# Allegro board twinsync_r1.brd
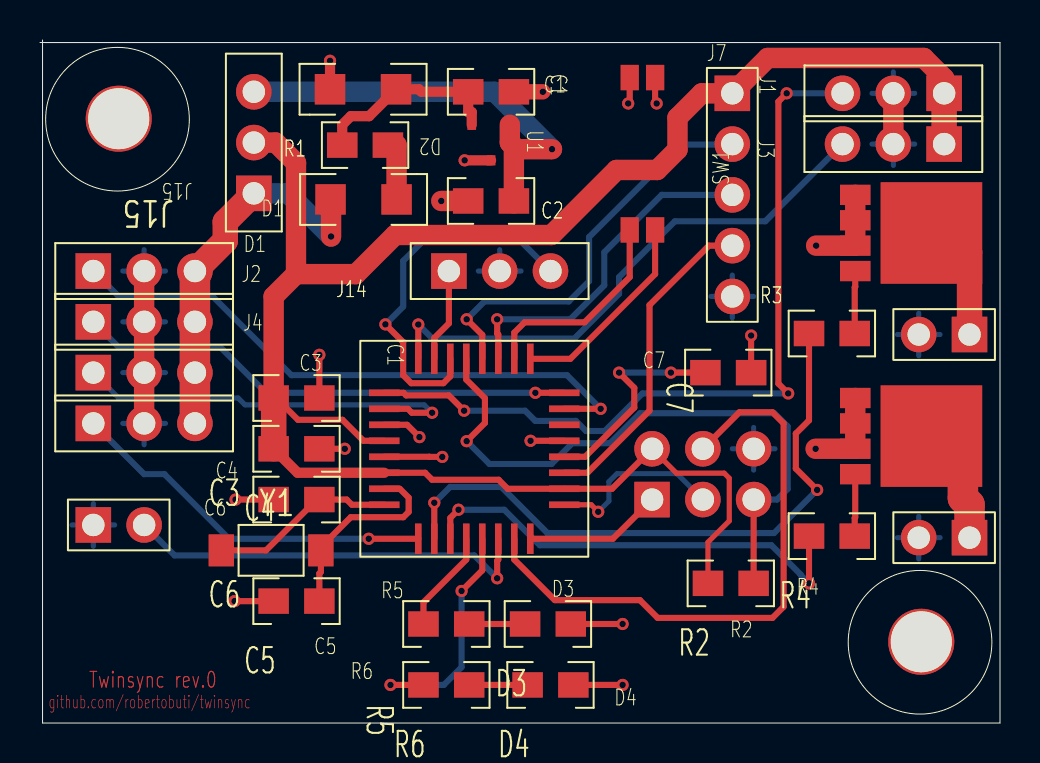
[diagram p0: board, top side]
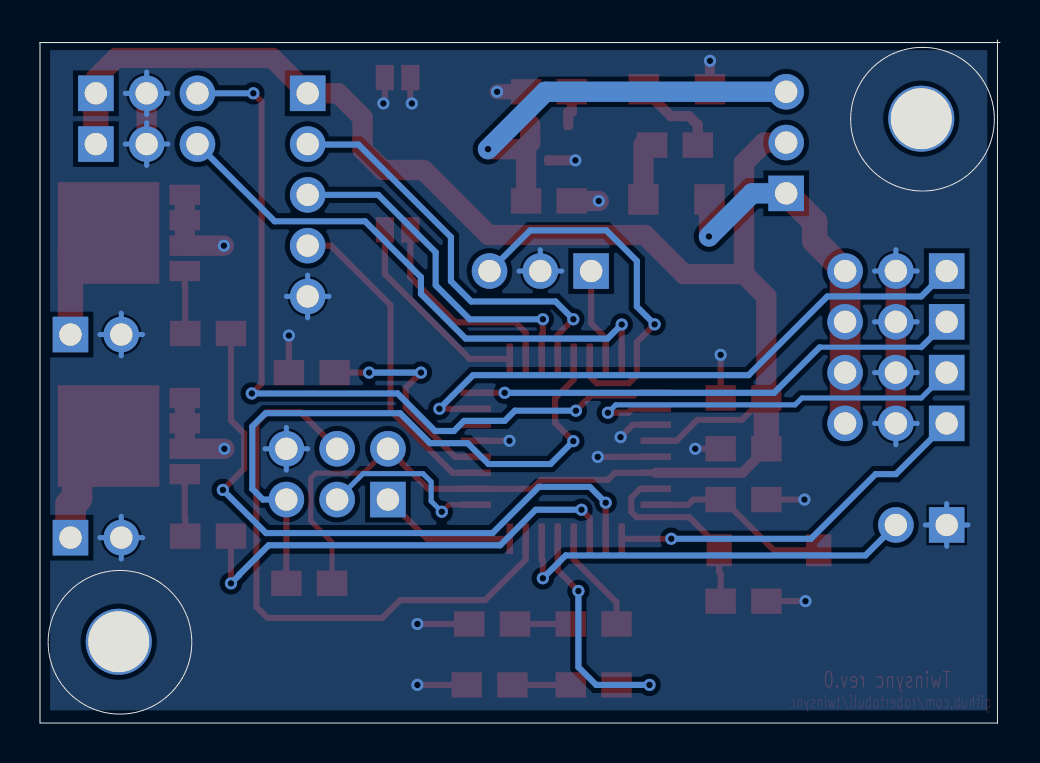
[diagram p1: board, bottom side, seen from below]

Outline 48.01 x 34.16 mm; copper layers: TOP, BOTTOM. Coordinates in mm from the lower left corner of the outline.
Outline path: circle c3.88,30.2 r3.59 ; circle c44.01,4.04 r3.59 ; 0,34.04 48.01,34.04 48.01,0 0.13,0 0.13,34.16

## Placement (name value [footprint] x y rotation side)
C1  100nF  [0805RF_WV_12D]  22.56 31.57 0 top
C2  100nF  [0805RF_WV_12D]  22.56 26.11 180 top
C3  100nF  [0805RF_WV_12D]  12.83 16.26 0 top
C4  100nF  [0805RF_WV_12D]  12.83 13.72 0 top
C5  22pF  [0805RF_WV_12D]  12.83 6.1 0 top
C6  22pF  [0805RF_WV_12D]  12.83 11.18 0 top
C7  100nF  [0805RF_WV_12D]  34.42 17.53 0 top
D1  LL4148  [MINIMELF]  16.18 26.19 0 top
D2  12V 400mW  [MINIMELF]  16.15 31.7 180 top
D3  rosso  [0805LED]  25.4 4.95 0 top
D4  giallo  [0805LED]  25.53 1.9 0 top
IC1  ATmega168-TQFP32  [TQFP32]  21.72 13.72 0 top
J1  HEADER 3  [JUMPER3]  42.67 31.5 270 top
J2  HEADER 3  [JUMPER3]  5.21 22.61 90 top
J3  HEADER 3  [JUMPER3]  42.67 28.96 270 top
J4  HEADER 3  [JUMPER3]  5.21 20.07 90 top
J5  HEADER 3  [JUMPER3]  5.21 17.53 90 top
J6  HEADER 3  [JUMPER3]  5.21 14.99 90 top
J7  HEADER 5  [JUMPER5]  34.62 31.5 270 top
J8  HEADER 2  [JUMPER2]  2.67 9.91 0 top
J9  PSMN0R7-25YLD  [LFPAK56]  43.31 25.15 0 top
J10  HEADER 2  [JUMPER2]  46.48 19.43 180 top
J11  PSMN0R7-25YLD  [LFPAK56]  43.31 14.99 0 top
J12  HEADER 2  [JUMPER2]  46.48 9.27 180 top
J13  HEADER 3X2  [JUMPER3X2]  35.69 11.18 90 top
J14  HEADER 3  [JUMPER3]  22.99 22.61 90 top
J15  jumper 3  [JUMPER3]  10.69 29.03 180 top
NOREF  -  [unnamed]  44.07 4.06 0 top
NOREF#2  -  [unnamed]  3.94 30.23 0 top
R1  10  [0805RF_WV_12D]  16.26 28.91 180 top
R2  10K  [0805RF_WV_12D]  34.54 6.98 0 top
R3  330  [0805RF_WV_12D]  39.6 19.48 0 top
R4  330  [0805RF_WV_12D]  39.6 9.35 0 top
R5  330  [0805RF_WV_12D]  20.32 4.95 0 top
R6  330  [0805RF_WV_12D]  20.32 1.9 0 top
SW1  SW DIP-2  [SOIC4W]  31.39 28.47 90 top
U1  LM3840IM3-5  [SOT23]  22.56 29.03 270 top
Y1  16MHz  [XTAL]  11.56 8.64 0 top

## Library data of the parts
C1-C7 = CAP NP
D1 = DIODE
D2 = DIODE ZENER
D3 D4 = LED
IC1 = ATmega168-TQFP32_2
J1-J6 J14 J15 = HEADER 3
J7 = HEADER 5
J8 J10 J12 = HEADER 2
J9 J11 = PSMN0R7-25YLD
J13 = HEADER 3X2
R1-R6 = R
SW1 = SW DIP-2
U1 = 73-OV_1
Y1 = CRYSTAL

## Footprints (pads in the part's own frame, mm; a bottom-side part is the same pattern mirrored in y, then rotated)
0805LED
  rect 1.524x1.27 smd: 1(-1.143,0) 2(1.143,0)
0805RF_WV_12D
  rect 1.524x1.27 smd: 1(-1.143,0) 2(1.143,0)
JUMPER2
  rect 1.778x1.778 hole 1.118: 1(0,0)
  round 1.778 hole 1.118: 2(2.54,0)
JUMPER3
  rect 1.778x1.778 hole 1.118: 1(0,2.54)
  round 1.778 hole 1.118: 2(0,0) 3(0,-2.54)
JUMPER3X2
  rect 1.778x1.778 hole 1.118: 1(0,5.08)
  round 1.778 hole 1.118: 2(2.54,5.08) 3(0,2.54) 4(2.54,2.54) 5(0,0) 6(2.54,0)
JUMPER5
  rect 1.778x1.778 hole 1.118: 1(0,0)
  round 1.778 hole 1.118: 2(2.54,0) 3(5.08,0) 4(7.62,0) 5(10.16,0)
LFPAK56
  rect 1.524x1.016 smd: 1(-2.54,1.27) 2(-2.54,0) 3(-2.54,-1.27) 4(-2.54,-2.54)
  rect 5.08x5.08 smd: 5(1.27,-0.635)
MINIMELF
  rect 1.524x1.524 smd: 1(-1.651,0) 2(1.651,0)
SOIC4W
  rect 1.27x0.914 smd: 1(-3.81,1.905) 2(-3.81,0.635) 3(3.81,0.635) 4(3.81,1.905)
SOT23
  rect 0.508x0.432 smd: 1(-0.889,0.94) 2(-0.889,-0.965) 3(0.889,0)
TQFP32
  rect 1.524x0.33 smd: 1(-4.5,2.8) 2(-4.5,2) 3(-4.5,1.2) 4(-4.5,0.4) 5(-4.5,-0.4) 6(-4.5,-1.2) 7(-4.5,-2) 8(-4.5,-2.8) 17(4.5,-2.8) 18(4.5,-2) 19(4.5,-1.2) 20(4.5,-0.4) 21(4.5,0.4) 22(4.5,1.2) 23(4.5,2) 24(4.5,2.8)
  rect 0.33x1.524 smd: 9(-2.8,-4.5) 10(-2,-4.5) 11(-1.2,-4.5) 12(-0.4,-4.5) 13(0.4,-4.5) 14(1.2,-4.5) 15(2,-4.5) 16(2.8,-4.5) 25(2.8,4.5) 26(2,4.5) 27(1.2,4.5) 28(0.4,4.5) 29(-0.4,4.5) 30(-1.2,4.5) 31(-2,4.5) 32(-2.8,4.5)
unnamed
  round 3.302 hole 3.048: (0,0)
XTAL
  rect 1.27x1.6 smd: 1(-2.489,0) 2(2.489,0)

## Nets
+5V: C3.1 C4.1 IC1.4(VCC1) IC1.6(VCC2) IC1.18(AVCC) J1.1 J3.1 J7.1 J13.2 J15.2 R2.1
GND_SIGNAL: C1.2 C2.2 C3.2 C4.2 C5.1 C6.1 C7.2 D2.2(ANODE) D3.2(CATHODE) D4.2(CATHODE) IC1.3(GND1) IC1.5(GND2) IC1.21(GND3) J1.2 J2.2 J3.2 J4.2 J5.2 J6.2 J7.5 J8.1 J9.1(S1) J9.2(S2) J9.3(S3) J10.2 J11.1(S1) J11.2(S2) J11.3(S3) J12.2 J13.6 J14.2 SW1.3(B2) SW1.4(B1) U1.3(GND)
ADC6: IC1.19(ADC6) J7.4
MISO: IC1.16(PB4(MISO/PCINT4)) J13.1
MOSI: IC1.15(PB3(MOSI/OC2A/PCINT3)) J13.4
PB0: IC1.12(PB0(ICP/PCINT0)) R5.1
PB1: IC1.13(PB1(OC1A/PCINT1)) R6.1
PB2: IC1.14(PB2(S\S\/OSC1B/PCINT2)) J8.2
PC0: IC1.23((ADC0/PCINT8)PC0) J2.1
PC1: IC1.24((ADC1/PCINT9)PC1) J4.1
PD4: IC1.2((XCK/T0/PCINT20)PD4) J5.1
PD5: IC1.9((T1/OC0B/PCINT21)PD5) J6.1
PD6: IC1.10((AIN0OC0A/PCINT22)PD6) R3.1
PD7: IC1.11((AIN1/PCINT23)PD7) R4.1
RESET: IC1.29((R\E\S\E\T\/PCINT14)PC6) J13.5 R2.2
RX: IC1.30((RXD/PCINT16)PD0) J14.3
SCK: IC1.17(PB5(SCK/PCINT5)) J13.3
SCL: IC1.28((ADC5/SCL/PCINT13)PC5) J7.2
SDA: IC1.27((ADC4/SDA/PCINT12)PC4) J7.3
TX: IC1.31((TXD/PCINT17)PD1) J14.1
V+: D1.1(A) J2.3 J4.3 J5.3 J6.3 J15.1
N02360: IC1.32((INT0/PCINT18)PD2) J3.3
N02372: IC1.1((INT1/OC2B/PCINT19)PD3) J1.3
N03923: C5.2 IC1.7(PB6(XTAL1/TOSC1/PCINT6)) Y1.2
N04074: C6.2 IC1.8(PB7(XTAL2/TOSC2/PCINT7)) Y1.1
N04680: C7.1 IC1.20(AREF)
N05693: D3.1(ANODE) R5.2
N05769: D4.1(ANODE) R6.2
N06773: IC1.26((ADC3/PCINT11)PC3) SW1.1(A1)
N06777: IC1.25((ADC2/PCINT10)PC2) SW1.2(A2)
N08505: C1.1 D2.1(CATHODE) R1.2 U1.2(IN)
N08538: C2.1 J15.3 U1.1(OUT+)
N25313: D1.2(K) R1.1
N30395: J9.5(D) J10.1
N30462: J9.4(G) R3.2
N30823: J11.5(D) J12.1
N30877: J11.4(G) R4.2

Pads without a net: IC1 22

## Via types
v1: diameter 0.61, hole 0.33, TOP to BOTTOM, 42 vias

## Routing (per net, layer and track width the routed paths; a pad name or vN(x,y) marks a point on that pad's centre or on a via; arc(x,y) is an arc through that point)
+5V: length 96
  TOP w0.254: J13.2 31.83,12.5 34.21,12.5 34.47,12.24 34.47,10.11 33.4,9.04 R2.1
  TOP w0.305: IC1.4 16.18,14.12 15.13,15.16 12.9,15.16 11.81,16.26 C3.1 ; IC1.6 19.26,12.52 19.61,12.17 22.94,12.17 23.39,11.72 IC1.18 28.61,11.72 J13.2
  TOP w0.508: IC1.6 12.88,12.52 C4.1
  TOP w1.016: 12.8,22.45 12.8,28.02 11.79,29.03 J15.2 ; 12.8,22.45 11.68,21.34 C3.1 ; 12.8,22.45 15.8,22.45 17.75,24.41 25.58,24.41 28.83,27.66 30.86,27.66 31.88,28.68 31.88,30.28 33.1,31.5 J7.1 36.39,33.26 44.2,33.26 45.21,32.25 J1.1
  TOP w1.27: J3.1 J1.1 ; C3.1 C4.1
GND_SIGNAL: length 92
  TOP w0.305: 35.56,17.53 v1(35.56,19.38) ; v1(20.12,13.31) 19.47,13.31 19.46,13.32 IC1.5 ; D4.2 v1(29.13,1.9) ; SW1.4 29.49,30.99 v1(29.41,30.99) ; D3.2 v1(29.13,4.95) ; C4.2 v1(15.24,13.72) ; C5.1 v1(9.73,6.1) ; IC1.3 18.36,14.92 v1(18.97,14.3) ; SW1.3 30.76,30.99 v1(30.84,30.99) ; C6.1 v1(9.78,11.18) ; IC1.21 v1(24.53,14.12) ; C3.2 v1(13.97,18.41)
  TOP w0.508: U1.3 v1(21.23,28.14) ; D2.2 v1(14.5,33.12)
  TOP w0.762: C1.2 v1(25.15,31.57)
  TOP w1.016: J9.1 J9.2 J9.3 v1(38.81,23.88) ; C2.2 v1(20.07,26.11) ; J2.2 J4.2 J5.2 J6.2 ; v1(38.79,13.72) J11.3 J11.2 J11.1 ; J1.2 J3.2
  BOTTOM w0.254: J14.2 22.99,23.67 ; J14.2 24.05,22.61 ; J14.2 21.92,22.61 ; 4.14,20.07 J4.2 6.27,20.07 ; J10.2 43.94,20.5 ; J10.2 42.87,19.43 ; J10.2 45.01,19.43 ; J10.2 43.94,18.36 ; J13.6 36.75,13.72 ; J13.6 35.69,14.78 ; J13.6 35.69,12.65 ; J13.6 34.62,13.72 ; 41.6,31.5 J1.2 ; J1.2 42.67,32.56 ; J1.2 43.74,31.5 ; J1.2 42.67,30.43 ; 34.62,20.27 J7.5 ; J7.5 35.69,21.34 ; J7.5 34.62,22.4 ; J7.5 33.55,21.34 ; 4.14,17.53 J5.2 6.27,17.53 ; 43.94,8.2 J12.2 ; J12.2 43.94,10.34 ; J12.2 42.87,9.27 ; J12.2 45.01,9.27 ; J2.2 6.27,22.61 ; J2.2 5.21,23.67 ; J2.2 4.14,22.61 ; 41.6,28.96 J3.2 ; J3.2 43.74,28.96 ; J3.2 42.67,30.02 ; J3.2 42.67,27.89 ; J8.1 2.67,10.97 ; J8.1 2.67,8.84 ; J8.1 3.73,9.91 ; J8.1 1.6,9.91 ; J6.2 6.27,14.99 ; J6.2 5.21,13.92 ; J6.2 4.14,14.99
ADC6: length 16.2
  TOP w0.305: J7.4 33.45,23.88 30.48,20.9 30.48,15.62 27.38,12.52 IC1.19
MISO: length 6.9
  TOP w0.305: J13.1 28.65,9.22 IC1.16
MOSI: length 30.1
  TOP w0.305: J13.4 34.98,15.54 36.63,15.54 37.19,14.99 37.19,5.82 36.63,5.26 30.89,5.26 30,6.15 25.74,6.15 23.72,8.17 IC1.15
PB0: length 5.1
  TOP w0.305: R5.1 19.18,6.03 21.32,8.17 IC1.12
PB1: length 12.4
  TOP w0.305: v1(21.08,6.6) 22.12,7.64 IC1.13 ; v1(17.53,1.9) R6.1
  BOTTOM w0.305: v1(17.53,1.9) 20.19,1.9 21.08,2.79 v1(21.08,6.6)
PB2: length 20.8
  TOP w0.305: IC1.14 22.92,8.17 22.86,8.12 v1(22.86,7.24)
  BOTTOM w0.305: v1(22.86,7.24) 21.72,8.38 6.73,8.38 J8.2
PC0: length 30
  TOP w0.305: IC1.23 v1(28.03,15.72)
  BOTTOM w0.305: J2.1 3.94,21.34 8.64,21.34 12.57,17.4 26.35,17.4 v1(28.03,15.72)
PC1: length 25
  TOP w0.305: IC1.24 v1(24.77,16.52)
  BOTTOM w0.254: 3.94,18.8 9.02,18.8
  BOTTOM w0.305: v1(24.77,16.52) 11.3,16.52 9.02,18.8 ; J4.1 3.94,18.8
PD4: length 20.2
  TOP w0.305: IC1.2 18.4,15.72 18.59,15.52 v1(19.61,15.52)
  BOTTOM w0.254: v1(19.61,15.52) 19.21,15.91 10.25,15.91 9.91,16.26 3.94,16.26 J5.1
PD5: length 18.6
  TOP w0.305: IC1.9 v1(16.44,9.22)
  BOTTOM w0.305: J6.1 5.21,12.45 6.22,12.45 9.45,9.22 v1(16.44,9.22)
PD6: length 31.7
  TOP w0.305: R3.1 38.46,15.14 37.8,14.48 37.8,12.73 v1(38.86,11.66) ; IC1.10 v1(19.72,11.02)
  BOTTOM w0.305: v1(38.86,11.66) 36.7,9.5 25.37,9.5 23.06,11.81 20.51,11.81 v1(19.72,11.02)
PD7: length 23.1
  TOP w0.305: v1(20.93,10.67) 20.52,10.26 IC1.11 ; R4.1 v1(38.46,6.98)
  BOTTOM w0.305: v1(38.46,6.98) 38.04,7.4 38.04,7.42 36.58,8.89 24.99,8.89 23.22,10.67 v1(20.93,10.67)
RESET: length 32
  TOP w0.305: IC1.29 21.32,17.17 22.25,16.24 22.25,15.01 v1(21.34,14.1) ; R2.2 J13.5
  BOTTOM w0.305: v1(21.34,14.1) 22.48,12.95 25.58,12.95 26.62,14 28.5,14 30,15.49 36.73,15.49 37.39,14.83 37.39,11.71 36.86,11.18 J13.5
RX: length 18.8
  TOP w0.305: v1(17.27,19.94) 18.16,19.05 18.16,17.4 18.56,17 20.17,17 20.52,17.34 IC1.30
  BOTTOM w0.305: J14.3 23.5,24.64 19.69,24.64 18.16,23.11 18.16,20.83 v1(17.27,19.94)
SCK: length 9
  TOP w0.254: v1(27.91,10.57) 27.57,10.92 IC1.17
  BOTTOM w0.254: J13.3 31.85,12.47 28.85,12.47 28.45,12.06 28.45,11.1 v1(27.91,10.57)
SCL: length 20.5
  TOP w0.305: IC1.28 22.12,19.41 v1(21.34,20.19)
  BOTTOM w0.305: 34.59,28.93 32.08,28.93 27.46,24.31 27.46,22.1 26.44,21.08 22.23,21.08 v1(21.34,20.19)
SDA: length 17.4
  TOP w0.305: v1(22.86,20.19) 22.86,19.48 22.92,19.42 IC1.27
  BOTTOM w0.305: 34.67,26.42 J7.3 31.09,26.42 28.22,23.55 28.22,21.89 26.52,20.19 v1(22.86,20.19)
TX: length 4.7
  TOP w0.305: IC1.31 19.72,19.26 20.45,19.99 J14.1
V+: length 19
  TOP w1.016: v1(14.55,24.33) 14.55,25.86
  TOP w1.27: J15.1 9.27,25.06 9.27,24.12 J2.3
  TOP w1.524: J6.3 J5.3 J4.3 J2.3
  BOTTOM w1.016: J15.1 12.4,26.49 v1(14.55,24.33)
N02360: length 27.7
  TOP w0.305: IC1.32 v1(18.92,19.93)
  BOTTOM w0.305: J3.3 36.27,25.1 31.75,25.1 28.96,22.3 28.96,21.46 26.72,19.23 19.62,19.23 v1(18.92,19.93)
N02372: length 39.9
  TOP w0.305: v1(37.41,16.48) 36.92,16.97 36.92,31.08 v1(37.34,31.5) ; v1(21.21,15.62) 20.44,16.39 18.31,16.39 18.18,16.52 IC1.1
  BOTTOM w0.305: v1(37.41,16.48) 30.13,16.48 28.25,14.61 27.3,14.61 26.8,15.11 24.77,15.11 24.26,15.62 v1(21.21,15.62) ; J1.3 v1(37.34,31.5)
N03923: length 10
  TOP w0.305: C5.2 13.97,7.48 14.05,7.56 Y1.2 14.05,8.8 15.54,10.29 18.17,10.29 18.44,10.56 18.44,11.27 17.99,11.72 IC1.7
N04074: length 9.3
  TOP w0.305: IC1.8 15.6,10.92 15.34,11.18 C6.2 13.84,11.18 11.3,8.64 Y1.1
N04680: length 10.9
  TOP w0.305: v1(31.55,17.53) C7.1 ; IC1.20 27.26,13.32 29.72,15.78 29.72,16.76 v1(28.96,17.53)
  BOTTOM w0.305: v1(28.96,17.53) v1(31.55,17.53)
N05693: length 2.8
  TOP w0.305: R5.2 D3.1
N05769: length 2.9
  TOP w0.305: R6.2 D4.1
N06773: length 10.6
  TOP w0.305: IC1.26 23.72,19.53 24.23,20.04 27.23,20.04 29.49,22.3 SW1.1
N06777: length 10.2
  TOP w0.305: SW1.2 30.76,22.45 26.52,18.22 IC1.25
N08505: length 10.1
  TOP w0.508: U1.2 21.59,30.56 21.41,30.56 C1.1 19.08,31.57 18.95,31.7 D2.1 16.46,30.35 15.54,30.35 15.11,29.92 R1.2 15.24,28.91
N08538: length 22.2
  TOP w0.762: 23.7,25.86 C2.1
  TOP w1.016: 23.7,28.7 23.7,28.83 23.5,29.03 U1.1 ; 23.7,28.7 v1(25.6,28.7) ; 23.7,28.7 C2.1
  BOTTOM w1.016: v1(25.6,28.7) 22.73,31.57 J15.3
N25313: length 4
  TOP w0.305: 17.35,25.86 17.35,26.19 D1.2
  TOP w1.016: R1.1 17.83,28.91 D1.2
N30395: length 8.7
  TOP w1.016: J9.5 46.15,24.51
  TOP w1.27: 46.15,25.15 46.15,24.51 46.15,25.15 ; 46.15,25.15 46.15,23.88 46.48,23.55 J10.1
N30462: length 3.1
  TOP w0.305: J9.4 40.77,21.82 40.74,21.79 R3.2
N30823: length 8.7
  TOP w1.016: J11.5 46.15,14.35
  TOP w1.524: 46.15,14.99 46.15,14.35 46.15,14.99 ; 46.15,14.99 46.15,11.25 46.48,10.92 J12.1
N30877: length 3.1
  TOP w0.305: J11.4 40.77,10.29 40.74,10.26 R4.2

## Copper pours and planes (outline as drawn; the poured copper is in the pictures)
GND_SIGNAL on BOTTOM: 0.64,33.66 0.64,0.63 47.5,0.63 47.5,33.66

## Text on the board
TOP: github.com/robertobuti/twinsync | Twinsync rev.0
NCLEGEND-1-2: FIGURE | SIZE | 13.0 | 44.0 | 120.0 | DRILL CHART: TOP to BOTTOM | ALL UNITS ARE IN MILS | PLATED | QTY | 44 | 41 | 2
